# Altium PCB Atom_Hub_Proto_Board.PcbDoc
Units mm, origin at the board's own origin, x right, y up, seen from the top; angles counter-clockwise.
Board outline 36 x 68 mm, 2 copper layers (Top Layer, Bottom Layer), stack 0.335 mm thick; 2 components, 13 nets, 309 pads, 1 vias.
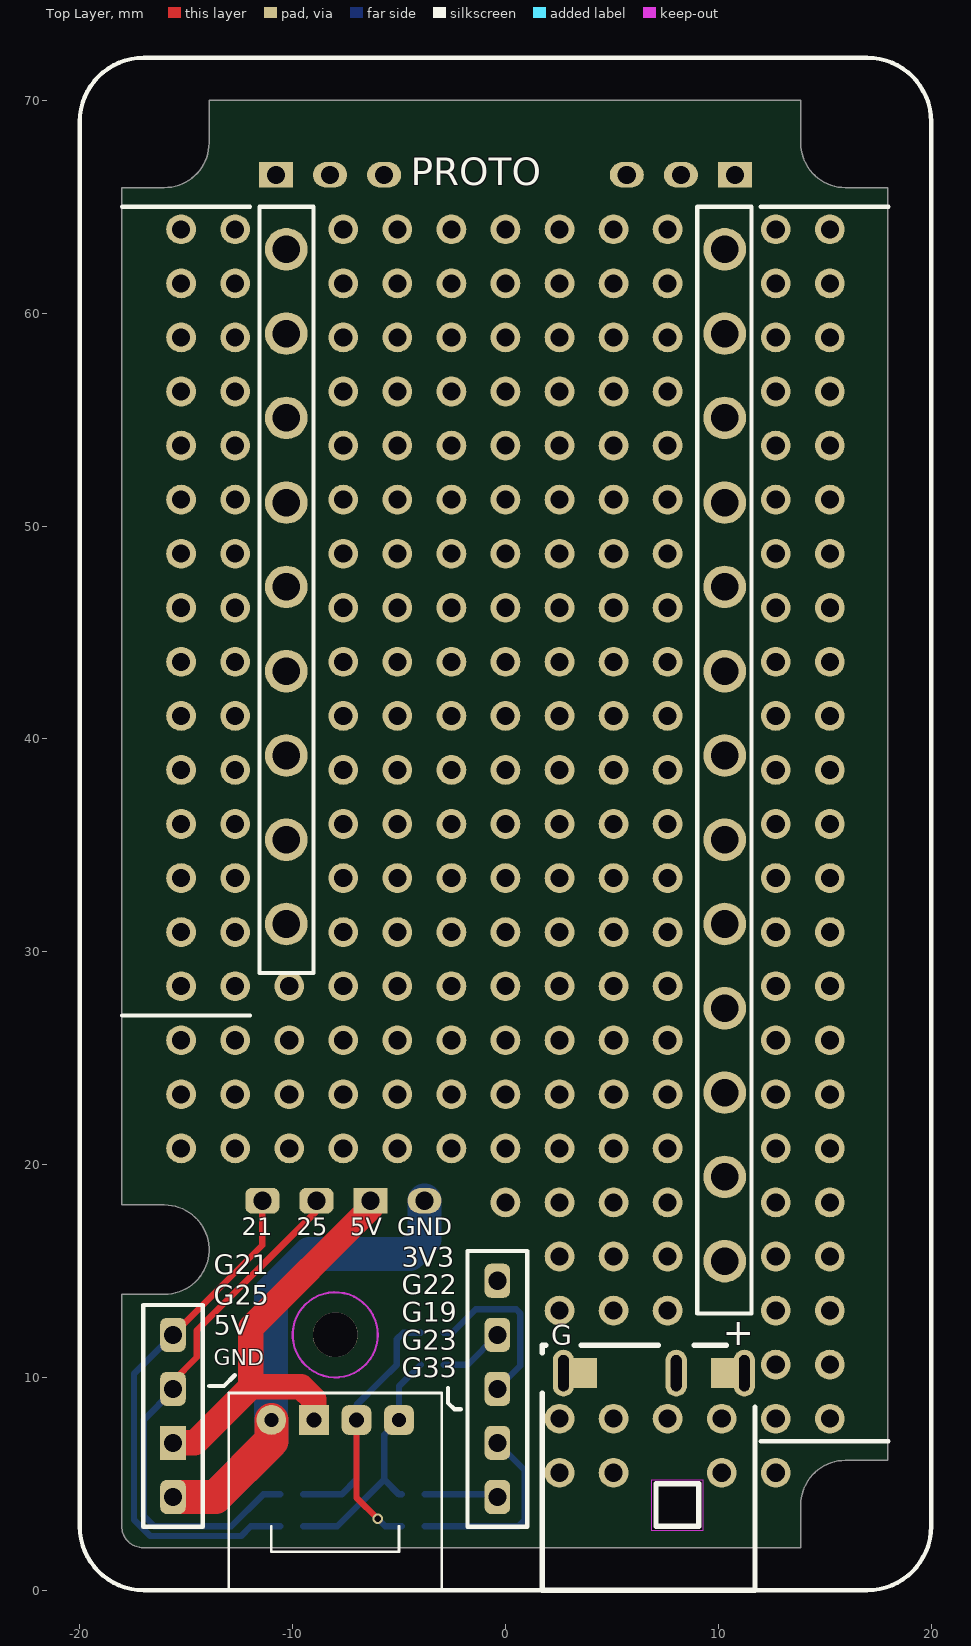
[diagram p0: Top Layer view]
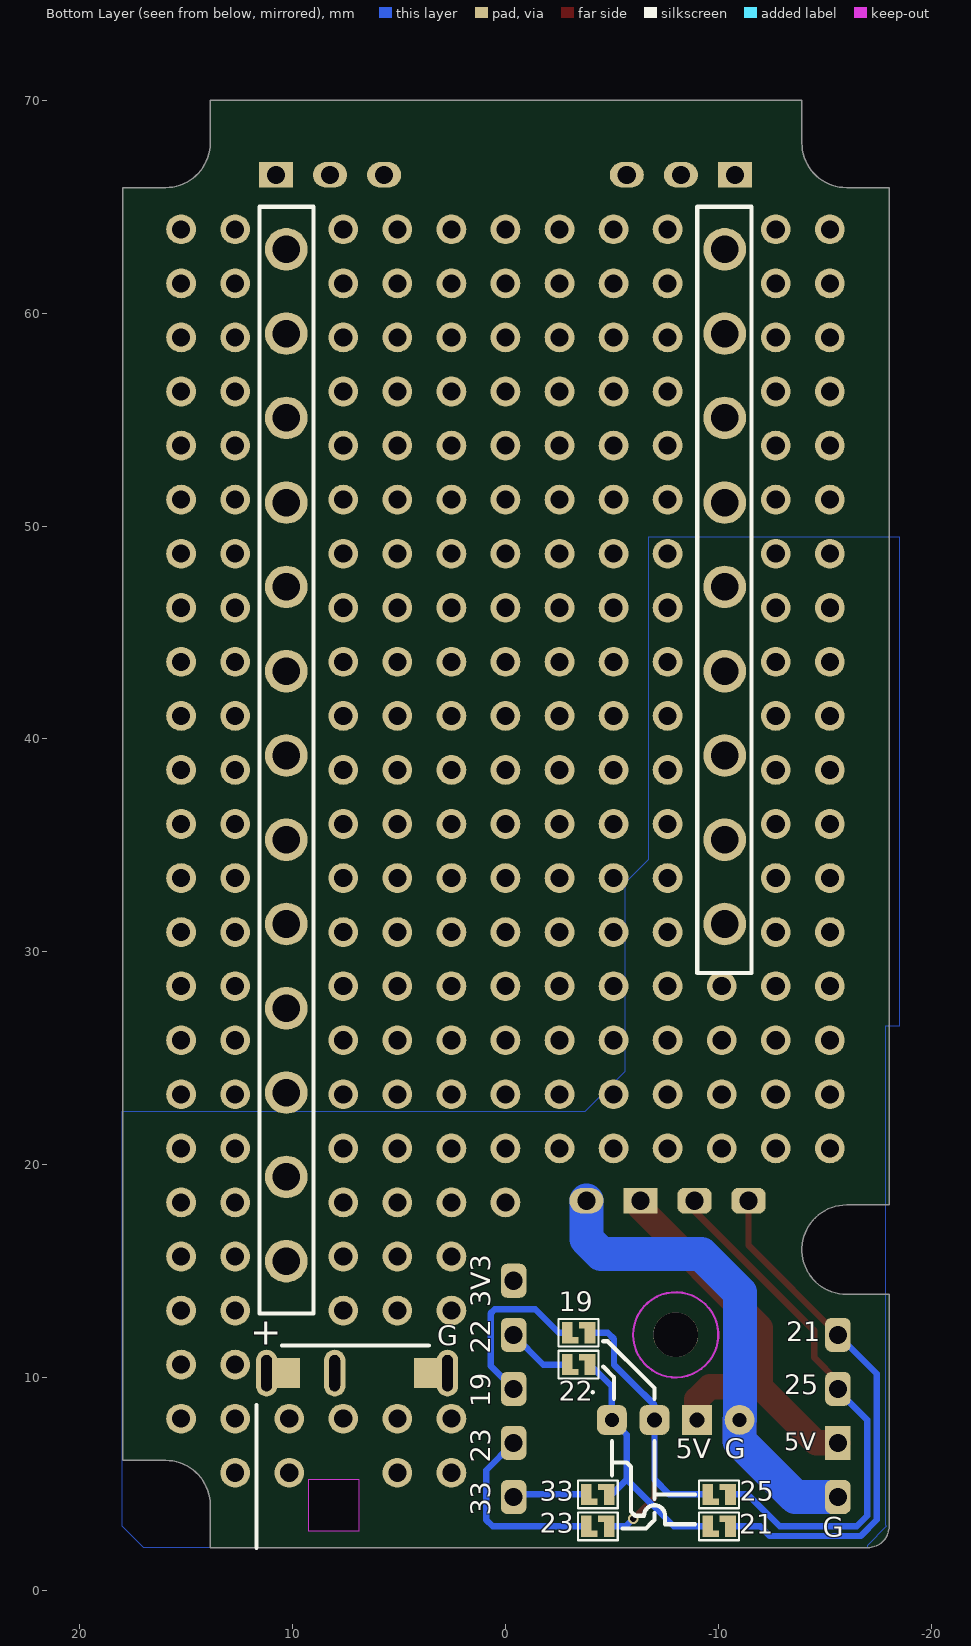
[diagram p1: Bottom Layer view, seen from below]

## Layer stack, top to bottom
Top Solder: solder mask 0.0102, Solder Resist, Dk 3.5
Top Layer: signal copper 0.0175
Dielectric1: core 0.3, FR-4, Dk 4.2
Bottom Layer: signal copper 0.0175
Bottom Solder: solder mask 0.0102, Solder Resist, Dk 3.5

## Board outline
-18.027,3 ccw(c-17.027,3) -17.027,2 13.873,2 13.873,4 cw(c15.973,4) 15.973,6.1 17.973,6.1 17.973,65.9 15.973,65.9 cw(c15.973,68) 13.873,68 13.873,70 -13.927,70 -13.927,68 cw(c-16.027,68) -16.027,65.9 -18.027,65.9 -18.027,18.1 -16.027,18.1 cw(c-16.027,16) -16.027,13.9 -18.027,13.9

## Design rules (kind name [scope] priority, off if disabled: settings)
Clearance [All] p1: gap=0.152 ignorepadtopadclearanceinfootprint=FALSE except(0: Arc-Hole Track-Hole SMDPad-Hole THPad-Hole Via-Hole Fill-Hole Poly-Hole Region-Hole Text-Hole)
PlaneConnect [All] p1: planeconnectstyle=Direct reliefexpansion=0.508 reliefentries=4 reliefconductorwidth=0.254 reliefairgap=0.254
PolygonConnect [All] p1: connectstyle=Direct reliefconductorwidth=0.254 reliefentries=4 polygonreliefangle="90 Angle" airgapwidth=0.254
RoutingVias [All] p1: holewidth=0.711 width=1.27 viastyle="Through Hole" minholewidth=0.711 minwidth=1.27 maxholewidth=0.711 maxwidth=1.27
SolderMaskExpansion [All] p1: expansion=0.102
Width [All] p1: maxlimit=2 minlimit=0.152 preferedwidth=0.381 minimp=50.000000 maximp=50.000000 favimp=50.000000
29 further rules are at their usual default settings.

## Components (designator, comment, footprint, x,y, rotation, side; value= is the part's Value field where it differs from the comment)
J2 "GPIO_Socket_4P" Grove -8,1.8 r270 top locked
PWR1 "DC-IN-TH_DC-0440-2.5A-2.0" DC-IN-TH_DC-0440-2.5A-2.0 6.973,10.2 r90 top

## Footprints (in the part's own frame and the unit in brackets; to place one, negate y for a bottom-side part, rotate by r counter-clockwise, add the part's x,y. Pads: shape width x height; smd on the part's side, far side on the other; paste and mask are expansions set on the pad)
DC-IN-TH_DC-0440-2.5A-2.0 [mm]
  oval 2.2x1 hole 0.5 slot 1.7 at 0 deg: 2-(0,4.25) 3(0,-1.05) 4+(0,-4.25)
  Keep-Out Layer board cut-out: -7.4,-2.3 -7.4,0.1 -5,0.1 -5,-2.3
  silkscreen extent -10.2,-4.75 1.3,5.25
Grove [mm]
  rrect50% 1.4x1.4 hole 0.65: 1(-6.2,3)
  rrect50% 1.4x1.4 hole 0.7: 2(-6.2,1)
  round 1.4 hole 0.65: 4(-6.2,-3)
  rect 1.4x1.4 hole 0.7: 5V(-6.2,-1)
  silkscreen extent -7.47,-5 1.8,5

## Free pads (board coordinates)
  round 1.4 hole 0.85: 3V3(-15.24,20.76) 3V3(-15.24,23.3) 3V3(-15.24,25.84) 3V3(-15.24,28.38) 3V3(-15.24,30.92) 3V3(-15.24,33.46) 3V3(-15.24,36) 3V3(-15.24,38.54) 3V3(-15.24,41.08) 3V3(-15.24,43.62) 3V3(-15.24,46.16) 3V3(-15.24,48.7) 3V3(-15.24,51.24) 3V3(-15.24,53.78) 3V3(-15.24,56.32) 3V3(-15.24,58.86) 3V3(-15.24,61.4) 3V3(-15.24,63.94) 3V3(-12.7,20.76) 3V3(-12.7,23.3) 3V3(-12.7,25.84) 3V3(-12.7,28.38) 3V3(-12.7,30.92) 3V3(-12.7,33.46) 3V3(-12.7,36) 3V3(-12.7,38.54) 3V3(-12.7,41.08) 3V3(-12.7,43.62) 3V3(-12.7,46.16) 3V3(-12.7,48.7) 3V3(-12.7,51.24) 3V3(-12.7,53.78) 3V3(-12.7,56.32) 3V3(-12.7,58.86) 3V3(-12.7,61.4) 3V3(-12.7,63.94) 3V3(-10.16,20.76) 3V3(-10.16,23.3) 3V3(-10.16,25.84) 3V3(-10.16,28.38) 3V3(-7.62,20.76) 3V3(-7.62,23.3) 3V3(-7.62,25.84) 3V3(-7.62,28.38) 3V3(-7.62,30.92) 3V3(-7.62,33.46) 3V3(-7.62,36) 3V3(-7.62,38.54) 3V3(-7.62,41.08) 3V3(-7.62,43.62) 3V3(-7.62,46.16) 3V3(-7.62,48.7) 3V3(-7.62,51.24) 3V3(-7.62,53.78) 3V3(-7.62,56.32) 3V3(-7.62,58.86) 3V3(-7.62,61.4) 3V3(-7.62,63.94) 3V3(-5.08,20.76) 3V3(-5.08,23.3) 3V3(-5.08,25.84) 3V3(-5.08,28.38) 3V3(-5.08,30.92) 3V3(-5.08,33.46) 3V3(-5.08,36) 3V3(-5.08,38.54) 3V3(-5.08,41.08) 3V3(-5.08,43.62) 3V3(-5.08,46.16) 3V3(-5.08,48.7) 3V3(-5.08,51.24) 3V3(-5.08,53.78) 3V3(-5.08,56.32) 3V3(-5.08,58.86) 3V3(-5.08,61.4) 3V3(-5.08,63.94) 3V3(-2.54,20.76) 3V3(-2.54,23.3) 3V3(-2.54,25.84) 3V3(-2.54,28.38) 3V3(-2.54,30.92) 3V3(-2.54,33.46) 3V3(-2.54,36) 3V3(-2.54,38.54) 3V3(-2.54,41.08) 3V3(-2.54,43.62) 3V3(-2.54,46.16) 3V3(-2.54,48.7) 3V3(-2.54,51.24) 3V3(-2.54,53.78) 3V3(-2.54,56.32) 3V3(-2.54,58.86) 3V3(-2.54,61.4) 3V3(-2.54,63.94) 3V3(0,18.22) 3V3(0,20.76) 3V3(0,23.3) 3V3(0,25.84) 3V3(0,28.38) 3V3(0,30.92) 3V3(0,33.46) 3V3(0,36) 3V3(0,38.54) 3V3(0,41.08) 3V3(0,43.62) 3V3(0,46.16) 3V3(0,48.7) 3V3(0,51.24) 3V3(0,53.78) 3V3(0,56.32) 3V3(0,58.86) 3V3(0,61.4) 3V3(0,63.94) 3V3(2.54,5.52) 3V3(2.54,8.06) 3V3(2.54,13.14) 3V3(2.54,15.68) 3V3(2.54,18.22) 3V3(2.54,20.76) 3V3(2.54,23.3) 3V3(2.54,25.84) 3V3(2.54,28.38) 3V3(2.54,30.92) 3V3(2.54,33.46) 3V3(2.54,36) 3V3(2.54,38.54) 3V3(2.54,41.08) 3V3(2.54,43.62) 3V3(2.54,46.16) 3V3(2.54,48.7) 3V3(2.54,51.24) 3V3(2.54,53.78) 3V3(2.54,56.32) 3V3(2.54,58.86) 3V3(2.54,61.4) 3V3(2.54,63.94) 3V3(5.08,5.52) 3V3(5.08,8.06) 3V3(5.08,13.14) 3V3(5.08,15.68) 3V3(5.08,18.22) 3V3(5.08,20.76) 3V3(5.08,23.3) 3V3(5.08,25.84) 3V3(5.08,28.38) 3V3(5.08,30.92) 3V3(5.08,33.46) 3V3(5.08,36) 3V3(5.08,38.54) 3V3(5.08,41.08) 3V3(5.08,43.62) 3V3(5.08,46.16) 3V3(5.08,48.7) 3V3(5.08,51.24) 3V3(5.08,53.78) 3V3(5.08,56.32) 3V3(5.08,58.86) 3V3(5.08,61.4) 3V3(5.08,63.94) 3V3(7.62,8.06) 3V3(7.62,13.14) 3V3(7.62,15.68) 3V3(7.62,18.22) 3V3(7.62,20.76) 3V3(7.62,23.3) 3V3(7.62,25.84) 3V3(7.62,28.38) 3V3(7.62,30.92) 3V3(7.62,33.46) 3V3(7.62,36) 3V3(7.62,38.54) 3V3(7.62,41.08) 3V3(7.62,43.62) 3V3(7.62,46.16) 3V3(7.62,48.7) 3V3(7.62,51.24) 3V3(7.62,53.78) 3V3(7.62,56.32) 3V3(7.62,58.86) 3V3(7.62,61.4) 3V3(7.62,63.94) 3V3(10.16,5.52) 3V3(10.16,8.06) 3V3(12.7,5.52) 3V3(12.7,8.06) 3V3(12.7,10.6) 3V3(12.7,13.14) 3V3(12.7,15.68) 3V3(12.7,18.22) 3V3(12.7,20.76) 3V3(12.7,23.3) 3V3(12.7,25.84) 3V3(12.7,28.38) 3V3(12.7,30.92) 3V3(12.7,33.46) 3V3(12.7,36) 3V3(12.7,38.54) 3V3(12.7,41.08) 3V3(12.7,43.62) 3V3(12.7,46.16) 3V3(12.7,48.7) 3V3(12.7,51.24) 3V3(12.7,53.78) 3V3(12.7,56.32) 3V3(12.7,58.86) 3V3(12.7,61.4) 3V3(12.7,63.94) 3V3(15.24,8.06) 3V3(15.24,10.6) 3V3(15.24,13.14) 3V3(15.24,15.68) 3V3(15.24,18.22) 3V3(15.24,20.76) 3V3(15.24,23.3) 3V3(15.24,25.84) 3V3(15.24,28.38) 3V3(15.24,30.92) 3V3(15.24,33.46) 3V3(15.24,36) 3V3(15.24,38.54) 3V3(15.24,41.08) 3V3(15.24,43.62) 3V3(15.24,46.16) 3V3(15.24,48.7) 3V3(15.24,51.24) 3V3(15.24,53.78) 3V3(15.24,56.32) 3V3(15.24,58.86) 3V3(15.24,61.4) 3V3(15.24,63.94)
  rect 0.5x1 smd far side: 3V3(-10.575,3) 3V3(-10.575,4.5) 3V3(-9.5,3) 3V3(-9.5,4.5) 3V3(-4.875,3) 3V3(-4.875,4.5) 3V3(-3.975,10.6) 3V3(-3.975,12.1) 3V3(-3.8,3) 3V3(-3.8,4.5) 3V3(-2.9,10.6) 3V3(-2.9,12.1)
  rect 0.4x0.3 smd far side: 3V3(-10.25,3.35) 3V3(-10.25,4.85) 3V3(-9.825,2.65) 3V3(-9.825,4.15) 3V3(-4.55,3.35) 3V3(-4.55,4.85) 3V3(-4.125,2.65) 3V3(-4.125,4.15) 3V3(-3.65,10.95) 3V3(-3.65,12.45) 3V3(-3.225,10.25) 3V3(-3.225,11.75)
  rrect50% 1.2x1.6 hole 0.85: 3V3(-0.38,14.54) G19(-0.38,9.46) G22(-0.38,12) G23(-0.38,6.92) G33(-0.38,4.38) GND(-15.62,4.38) SCLG21(-15.62,12) SDAG25(-15.62,9.46)
  rect 1.4x1.4 smd: 3V3(3.6,10.2) 3V3(10.346,10.2)
  rect 1.4x1.4 smd far side: 3V3(3.6,10.2) 3V3(10.346,10.2)
  round 2 hole 1.3: 12V(-10.3,51.1) 12V(-10.3,47.14) 12V(-10.3,43.18) 12V(-10.3,39.22) 12V(-10.3,35.26) 12V(-10.3,31.3) 12V(-10.3,55.08) 12V(-10.3,59.04) 12V(-10.3,63) 12V(10.3,15.46) 12V(10.3,55.08) 12V(10.3,59.04) 12V(10.3,63) 12V(10.3,19.42) 12V(10.3,23.38) 12V(10.3,27.34) 12V(10.3,31.3) 12V(10.3,35.26) 12V(10.3,39.22) 12V(10.3,43.18) 12V(10.3,47.14) 12V(10.3,51.1)
  round 3.9 on Top Solder: 35(-8,12)
  round 3.9 on Bottom Solder: 35(-8,12)
  round 2.1 hole 2.1: G13(-8,12)
  oval 1.6x1.2 hole 0.85: GND(-3.8,18.3) ""(-8.24,66.5) ""(-5.7,66.5) ""(5.7,66.5) ""(8.24,66.5)
  rrect50% 1.6x1.2 hole 0.85: SCLG21(-11.42,18.3) SDAG25(-8.88,18.3)
  rect 1.2x1.6 hole 0.85: ""(-15.62,6.92)
  rect 1.6x1.2 hole 0.85: ""(-10.78,66.5) ""(-6.34,18.3) ""(10.78,66.5)

## Via types
v1: diameter 0.5, hole 0.3, Top Layer to Bottom Layer, tented both sides, 1 vias

## Nets (pads, with @x,y where several pads share a name; then routed paths per layer and width w, separated by ;. In a path a pad name is that pad's centre, name@x,y a point inside that pad or via, vN(x,y) a via of type N, cw(c..) or ccw(c..) an arc to the next point about the centre after c; other vN are vias at no path point)
3V3: pad.3V3@-0.38,14.54
5V: J2.5V pad.@-6.34,18.3 pad.@-15.62,6.92 | length 20
  Top Layer w1.2: pad.@-15.62,6.92 -14.6,6.92 -11.968,9.552 ; J2.5V -9,8.96 -9.592,9.552 -11.968,9.552 ; pad.@-6.34,18.3 -6.34,17.96 -11.968,12.332 -11.968,9.552
12V: 
12Vin: 
A: 
B: 
GND: J2.4 pad.3V3@3.6,10.2 pad.GND PWR1.2- | length 28.8
  Top Layer w1.6: pad.GND@-15.3,4.38 -13.62,4.38 -11,7 J2.4
  Bottom Layer w1.6: pad.GND@-15.3,4.38 -13.62,4.38 -11,7 J2.4 -11.022,8.022 -11.022,13.978 -9.2,15.8 -4.5,15.8 -3.8,16.5 pad.GND@-3.8,18.3
Relay1: pad.G22
Relay2: pad.G19
Rxd: pad.G33
SCL: pad.3V3@-10.25,3.35 pad.3V3@-10.575,3 pad.SCLG21 | length 24.9
  Top Layer w0.3: pad.SCLG21@-15.62,12 -11.42,16.2 pad.SCLG21@-11.42,18.3
  Bottom Layer w0.3: pad.SCLG21@-15.62,12 -17.452,10.168 -17.452,3.313 -16.687,2.548 -12.42,2.548 -11.968,3 pad.3V3@-10.575,3
SDA: pad.3V3@-10.25,4.85 pad.3V3@-10.575,4.5 pad.SDAG25 | length 25.1
  Top Layer w0.3: pad.SDAG25@-15.62,9.82 -14.5,10.94 -14.5,12.2 -8.88,17.82 pad.SDAG25@-8.88,18.3
  Bottom Layer w0.3: pad.SDAG25@-15.62,9.46 -15.62,9.38 -17,8 -17,3.5 -16.5,3 -12.88,3 -11.38,4.5 pad.3V3@-10.575,4.5
Txd: pad.G23
pads on no net: J2.1 J2.2 PWR1.3 PWR1.4+
copper on no net: | length 53.4
  Top Layer w0.3: -7,8 -7,4.35 v1(-6,3.35)
  Bottom Layer w0.3: -9.5,3 -7.9,3 -5.7,5.2 ; -9.5,4.5 -7.7,4.5 -7,5.2 -7,8 -7,8.7 -5.9,9.8 -5.1,10.6 -5.1,11.8 -4.8,12.1 -3.975,12.1 ; v1(-6,3.35) -5.65,3 -4.875,3 ; -4.875,4.5 -5,4.5 -5.7,5.2 ; -3.975,10.6 -5,9.575 -5,8 -5.7,7.3 -5.7,5.2 ; -3.8,3 0.6,3 0.9,3.3 0.9,5.64 -0.38,6.92 ; -3.8,4.5 -0.5,4.5 -0.38,4.38 ; -2.9,10.6 -1.78,10.6 -0.38,12 ; -2.9,12.1 -2.5,12.1 -1.4,13.2 0.5,13.2 0.7,13 0.7,10.54 -0.38,9.46

## Polygon pours and split planes (outlines as drawn)
GND on Bottom Layer "gn" (solid, remove dead copper, shelved, pour order 6): -18.5,49.5 -18.5,26.5 -17.835,26.5 -17.835,3.065 -17.9,3 -17,2.1 -17,2 17,2 18,3 18,22.5 -3.75,22.5 -5.627,24.377 -5.627,33.25 -6.73,34.353 -6.73,49.5

## Keep-outs
Keep-Out Layer:
  circle w0.1: c-8,12 r2

## Silkscreen, mask and mechanical layers (free items; w line width, h text height)
Top Overlay:
  lines w0.2: -18,27 -12,27 ; -18,65 -12,65 ; -13.92,9.6 -13.22,9.6 -12.72,10.1 ; -2.7,9.5 -2.7,8.8 -2.4,8.5 -2.1,8.5 ; 12,7 18,7 ; 12,65 18,65 ; -20,3 ccw(c-17,3) -17,0 17,0 ccw(c17,3) 20,3 20,69 ccw(c17,69) 17,72 -17,72 ccw(c-17,69) -20,69 -20,3 ; -17.02,2.98 -17.02,13.4 -14.22,13.4 -14.22,2.98 -17.02,2.98 ; -11.557,29 -9.017,29 -9.017,65 -11.557,65 -11.557,29 ; -1.78,2.98 1.02,2.98 1.02,15.94 -1.78,15.94 -1.78,2.98 ; 9.017,13 9.017,65 11.557,65 11.557,13 9.017,13
  text "PROTO" at -4.445,65.591 h2.2
  text "21" at -12.4,16.4 h1.4
  text "25" at -9.8,16.4 h1.4
  text "5V" at -7.3,16.4 h1.4
  text "GND" at -5.08,16.4 h1.4
  text "3V3" at -4.864,14.9 h1.6
  text "G21" at -13.7,14.54 h1.6
  text "G22" at -4.864,13.6 h1.6
  text "G25" at -13.716,13.1 h1.6
  text "G19" at -4.864,12.3 h1.6
  text "5V" at -13.716,11.7 h1.6
  text "G" at 2.159,11.235 h1.6
  text "+" at 10.2,11.095 h2.2
  text "G23" at -4.864,11 h1.6
  text "GND" at -13.716,10.3 h1.3
  text "G33" at -4.864,9.7 h1.6
Bottom Overlay:
  lines w0.1: -10.975,2.35 -9.1,2.35 -9.1,3.65 -10.975,3.65 -10.975,2.35 ; -10.975,3.85 -10.975,5.15 -9.1,5.15 -9.1,3.85 -10.975,3.85 ; -5.275,2.35 -3.4,2.35 -3.4,3.65 -5.275,3.65 -5.275,2.35 ; -5.275,3.85 -3.4,3.85 -3.4,5.15 -5.275,5.15 -5.275,3.85 ; -4.375,9.95 -4.375,11.25 -2.5,11.25 -2.5,9.95 -4.375,9.95 ; -4.375,11.45 -4.375,12.75 -2.5,12.75 -2.5,11.45 -4.375,11.45
  lines w0.2: -8.9,3.1 -7.5,3.1 -7.5,3.5 cw(c-7.005,3.5) -6.51,3.5 -6.1,3.5 -5.9,3.7 -5.9,5.8 -5.7,6 -5,6 ; -8.9,4.5 -7.1,4.5 ; -7,3.63 -7,3.3 -6.9,3.2 -6.6,2.9 -5.5,2.9 ; -7,4.3 -7,7 ; -7,9 -7,9.5 -6.6,9.9 -4.8,11.7 -4.6,11.7 ; -5.1,9 -5.1,10 -4.6,10.5 ; -5,5.4 -5,7 ; 3.6,11.5 10.5,11.5 ; 11.7,2 11.7,8.7 ; -11.557,29 -11.557,65 -9.017,65 -9.017,29 -11.557,29 ; -4.1,9.3 -4.1,9.3 ; 9.017,13 11.557,13 11.557,65 9.017,65 9.017,13
  text "3V3" at 0.4,13.3 h1.6 r270
  text "19" at -2.5,12.8 h1.6
  text "21" at -13.2,11.4 h1.6
  text "G" at 3.2,11.2 h1.6
  text "22" at 0.4,11.1 h1.6 r270
  text "+" at 12,11.1 h2.2
  text "25" at -13.1,8.9 h1.6
  text "22" at -2.5,8.6 h1.6
  text "19" at 0.4,8.6 h1.6 r270
  text "5V" at -13.1,6.3 h1.4
  text "23" at 0.4,6 h1.6 r270
  text "G" at -10.3,5.9 h1.6
  text "5V" at -8,5.9 h1.6
  text "25" at -11,3.9 h1.6
  text "33" at -1.6,3.9 h1.6
  text "33" at 0.4,3.5 h1.6 r270
  text "23" at -1.6,2.4 h1.6
  text "21" at -10.975,2.35 h1.6
  text "G" at -14.9,2.2 h1.6
Mechanical 1:
  circle w0.1: c8.073,4 r0.9
  lines w0.2: -18.027,3 ccw(c-17.027,3) -17.027,2 13.873,2 13.873,4 cw(c15.973,4) 15.973,6.1 17.973,6.1 17.973,65.9 15.973,65.9 cw(c15.973,68) 13.873,68 13.873,70 -13.927,70 -13.927,68 cw(c-16.027,68) -16.027,65.9 -18.027,65.9 -18.027,53.7 -18.027,49.8 -18.027,26.2 -18.027,18.1 -16.027,18.1 cw(c-16.027,16) -16.027,13.9 -18.027,13.9 -18.027,3